# EAGLE board ACBoard (EAGLE 6.0)
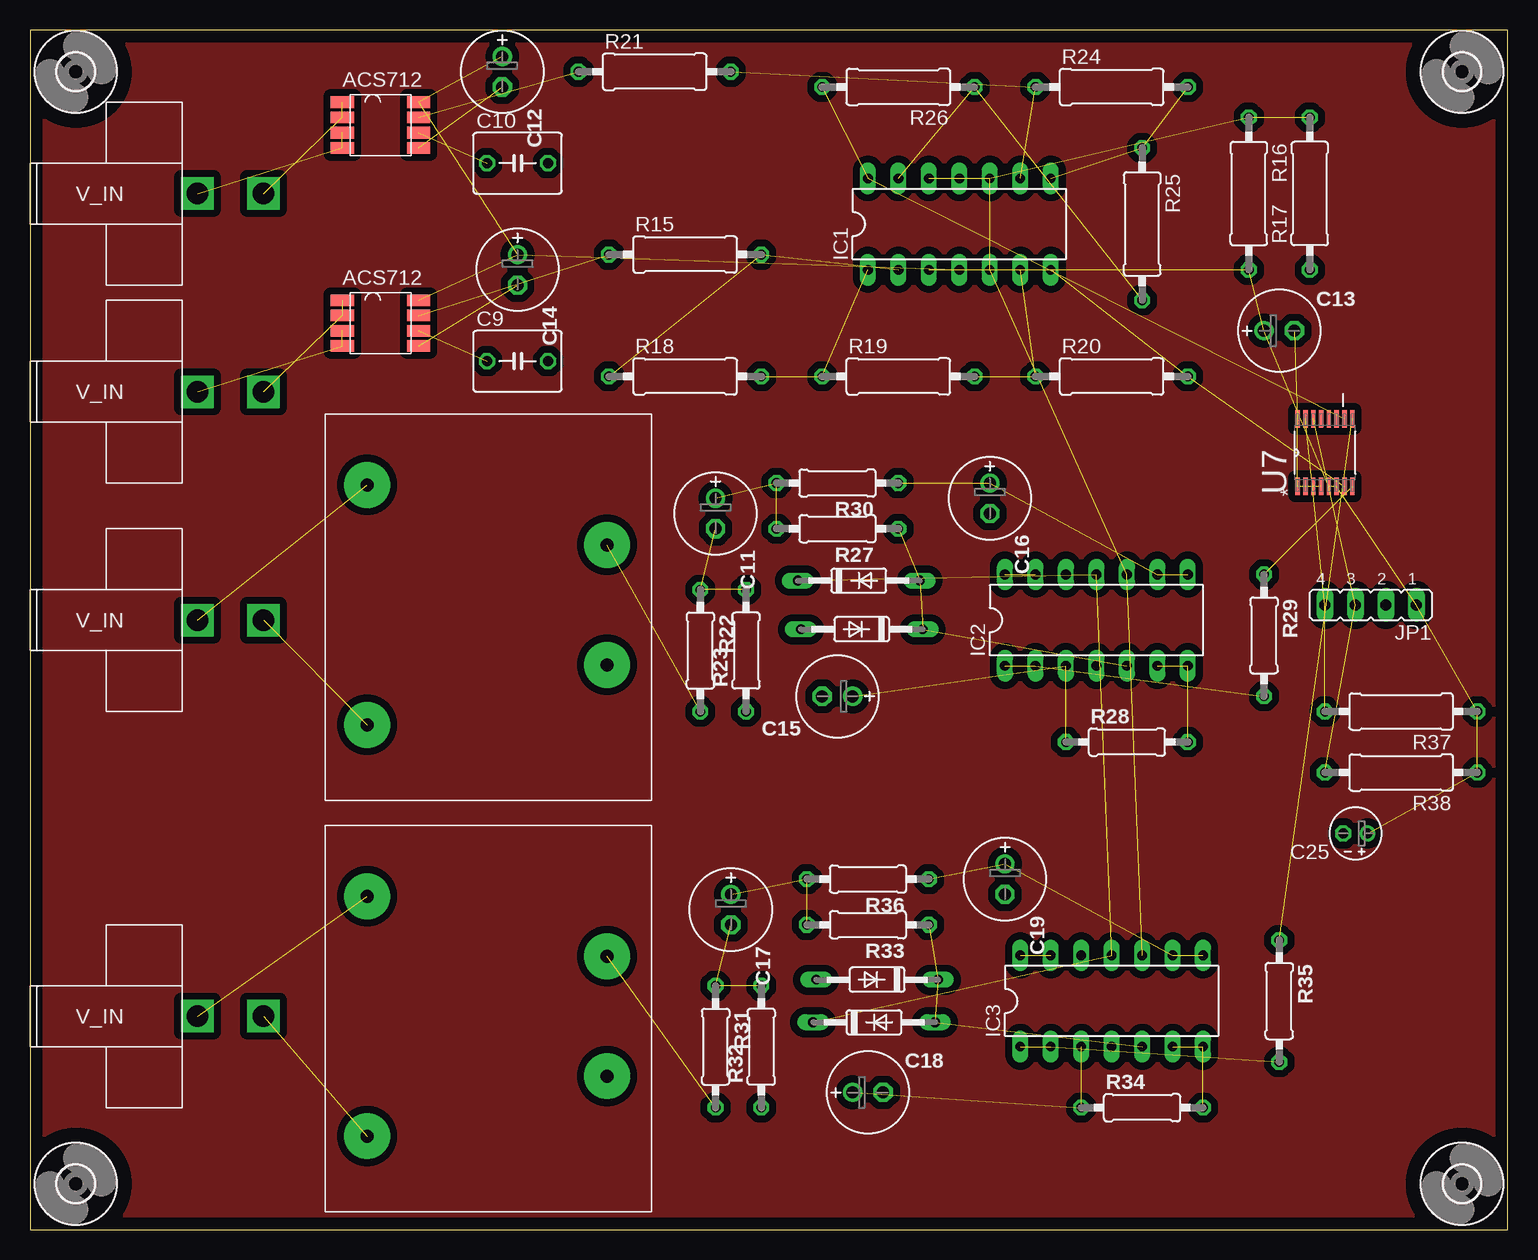
[diagram p0: board, top side]
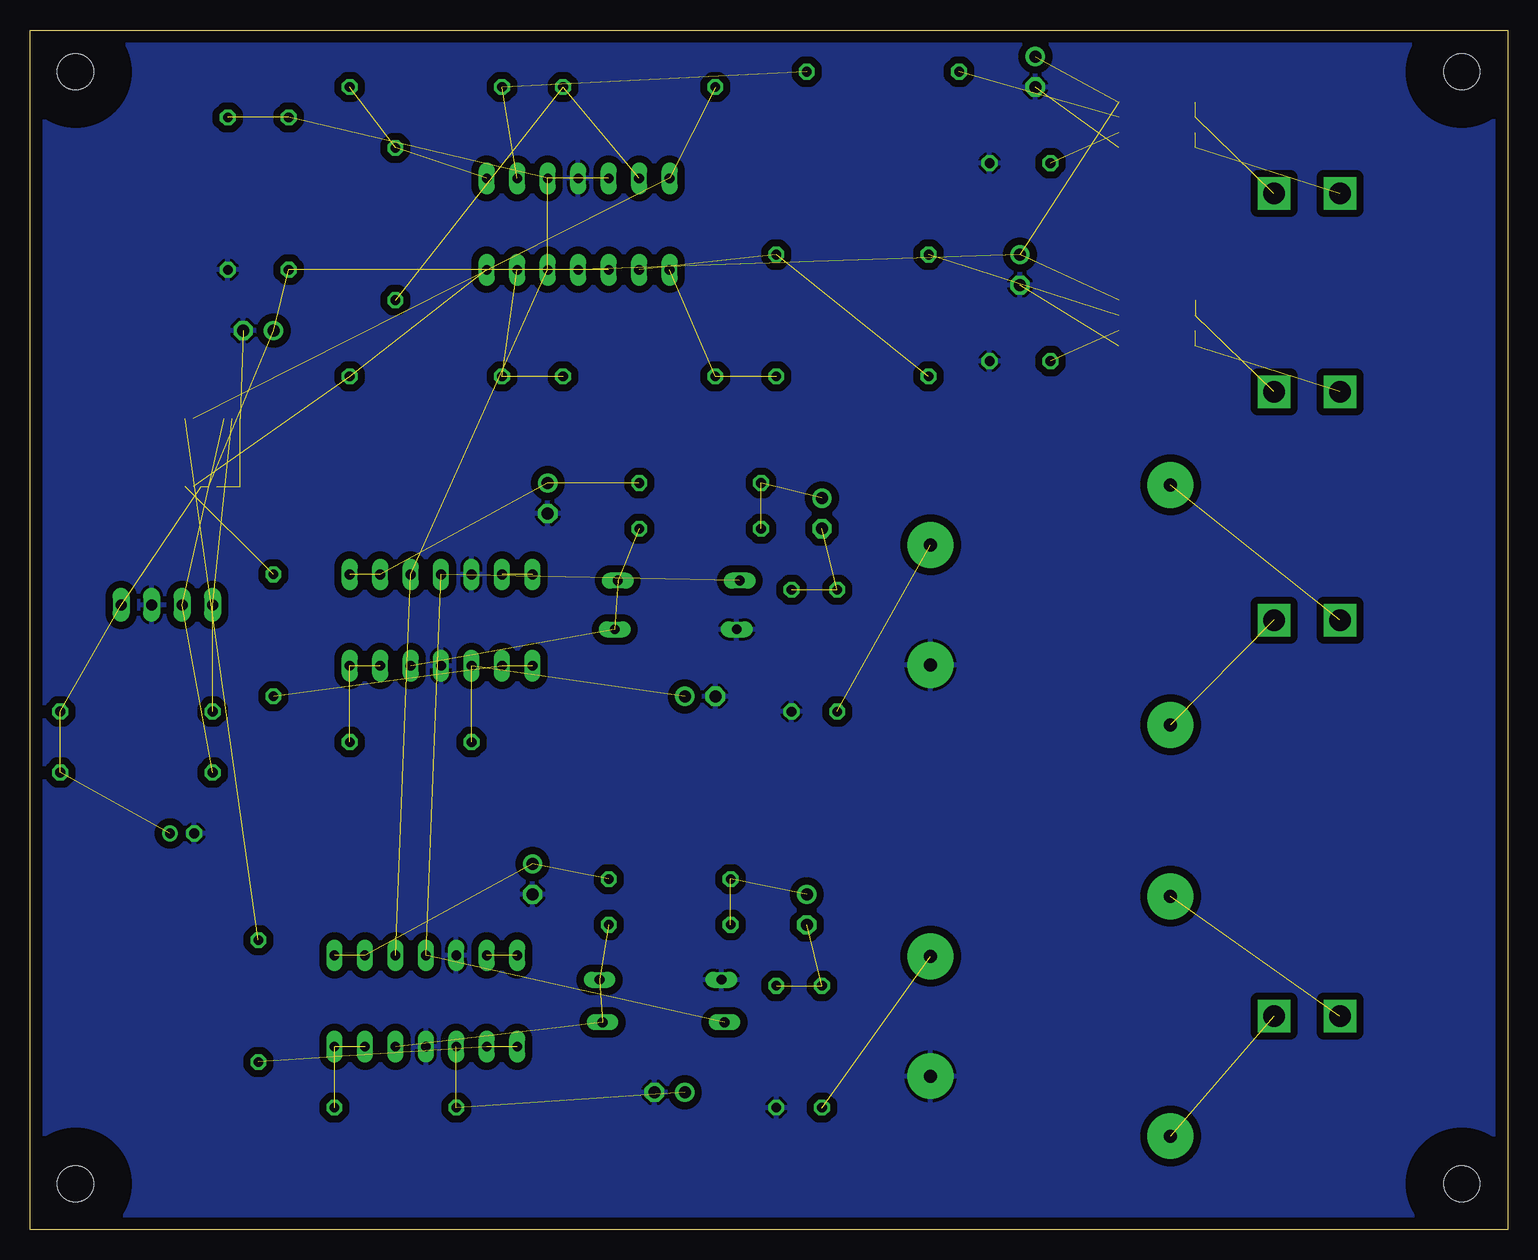
[diagram p1: board, bottom side, seen from below]

Size 123.17 x 100 mm. Coordinates in mm from the lower left corner, seen from the top.
Outline: 0,0 123.17,0 123.17,100 0,100 0,0
Copper layers (1*16): Top 0.035mm / dielectric 1.5mm / Bottom 0.035mm
Design rules: minimum track width 10mil, minimum drill 24mil, track to track 8mil, track to pad 8mil, pad to pad 8mil, via to via 8mil, smd to smd 8mil, copper to edge 40mil, drill to drill 8mil, minimum pad ring 10mil, minimum via ring 8mil, stop-mask expansion 4mil, vias tented up to drill 0mil, thermal gap 10mil

## Footprints (pad centres in the part's own frame; a part is rotated, then mirrored left to right if it is on the bottom)
C050-050X075 = drill 0.813 octagon: 1 -2.54,0; 2 2.54,0
E2,5-7---100UF = drill 1 pad 1.6: + -1.27,0 | drill 1 pad 1.6 octagon: - 1.27,0
E2-4 = drill 0.813 pad 1.27: + -1.016,0 | drill 0.813 pad 1.27 octagon: - 1.016,0
DIL14 = drill 0.813 long: 1 -7.62,-3.81; 2 -5.08,-3.81; 3 -2.54,-3.81; 4 0,-3.81; 5 2.54,-3.81; 6 5.08,-3.81; 7 7.62,-3.81; 8 7.62,3.81; 9 5.08,3.81; 10 2.54,3.81; 11 0,3.81; 12 -2.54,3.81; 13 -5.08,3.81; 14 -7.62,3.81
JP4 = drill 0.914 long: 1 -3.81,0; 2 -1.27,0; 3 1.27,0; 4 3.81,0
0309/12 = drill 0.813 octagon: 1 -6.35,0; 2 6.35,0
0207/10 = drill 0.8 octagon: 1 -5.08,0; 2 5.08,0
SOP65P640X120-16N = smd 1.473 x 0.356: 1 -2.819,2.286; 2 -2.819,1.626; 3 -2.819,0.965; 4 -2.819,0.33; 5 -2.819,-0.33; 6 -2.819,-0.965; 7 -2.819,-1.626; 8 -2.819,-2.286; 9 2.819,-2.286; 10 2.819,-1.626; 11 2.819,-0.965; 12 2.819,-0.33; 13 2.819,0.33; 14 2.819,0.965; 15 2.819,1.626; 16 2.819,2.286
INPUT_VOLTAGE_CONNECTOR = drill 1.8 square: V+ 0,0; V- 5.5,0
3,0 = hole 3: 0,0
SOIC8 = smd 1.93 x 0.965: 1 -4.445,1.27; 2 -4.445,0; 3 -4.445,-1.27; 4 -4.445,-2.54; 5 1.905,-2.54; 6 1.905,-1.27; 7 1.905,0; 8 1.905,1.27
4408 = drill 1.1 pad 3.81: PIN1 -10,10; PIN5 10,10; PIN7 5,-10; PIN9 -5,-10
D035-10 = drill 0.813 long: A 4.318,0.762; C -5.842,0.762

## Placement (x,y rotation side)
C9  1n  [C050-050X075]  40.64,72.39 0 top
C10  1n  [C050-050X075]  40.64,88.9 0 top
C11  100u Electrolytic  [E2,5-7---100UF]  57.15,59.69 270 top
C12  [E2,5-7---100UF]  39.37,96.52 270 top
C13  [E2,5-7---100UF]  104.14,74.93 0 top
C14  [E2,5-7---100UF]  40.64,80.01 270 top
C15  22n Ceramic  [E2,5-7---100UF]  67.31,44.45 180 top
C16  100n  [E2,5-7---100UF]  80.01,60.96 270 top
C17  100u Electrolytic  [E2,5-7---100UF]  58.42,26.67 270 top
C18  22n Ceramic  [E2,5-7---100UF]  69.85,11.43 0 top
C19  100n  [E2,5-7---100UF]  81.28,29.21 270 top
C25  [E2-4]  110.49,33.02 180 top
IC1  MCP604P  [DIL14]  77.47,83.82 0 top
IC2  MCP604P  [DIL14]  88.9,50.8 0 top
IC3  MCP604P  [DIL14]  90.17,19.05 0 top
JP1  [JP4]  111.76,52.07 180 top
R15  1k  [0309/12]  54.61,81.28 0 top
R16  1k  [0309/12]  101.6,86.36 270 top
R17  1k  [0309/12]  106.68,86.36 90 top
R18  1.5k  [0309/12]  54.61,71.12 0 top
R19  2k  [0309/12]  72.39,71.12 0 top
R20  1k  [0309/12]  90.17,71.12 0 top
R21  1k  [0309/12]  52.07,96.52 0 top
R22  56k  [0207/10]  55.88,48.26 270 top
R23  10k  [0207/10]  59.69,48.26 90 top
R24  1.5k  [0309/12]  90.17,95.25 0 top
R25  2k  [0309/12]  92.71,83.82 270 top
R26  1k  [0309/12]  72.39,95.25 180 top
R27  5.1k  [0207/10]  67.31,58.42 180 top
R28  100k  [0207/10]  91.44,40.64 0 top
R29  500  [0207/10]  102.87,49.53 270 top
R30  20k  [0207/10]  67.31,62.23 180 top
R31  56k  [0207/10]  57.15,15.24 270 top
R32  10k  [0207/10]  60.96,15.24 90 top
R33  5.1k  [0207/10]  69.85,25.4 180 top
R34  100k  [0207/10]  92.71,10.16 0 top
R35  500  [0207/10]  104.14,19.05 270 top
R36  20k  [0207/10]  69.85,29.21 180 top
R37  1.5k  [0309/12]  114.3,43.18 180 top
R38  1.5k  [0309/12]  114.3,38.1 180 top
U7  AD7993BRUZ-0  [SOP65P640X120-16N]  107.95,64.77 90 top
U$1  INPUT_VOLTAGE_CONNECTOR  [INPUT_VOLTAGE_CONNECTOR]  13.97,50.8 0 top
U$2  INPUT_VOLTAGE_CONNECTOR  [INPUT_VOLTAGE_CONNECTOR]  13.97,86.36 0 top
U$3  INPUT_VOLTAGE_CONNECTOR  [INPUT_VOLTAGE_CONNECTOR]  13.97,69.85 0 top
U$4  INPUT_VOLTAGE_CONNECTOR  [INPUT_VOLTAGE_CONNECTOR]  13.97,17.78 0 top
U$5  [3,0]  3.81,96.52 0 top
U$6  [3,0]  3.81,3.81 0 top
U$7  [3,0]  119.38,96.52 0 top
U$8  [3,0]  119.38,3.81 0 top
U$9  ACS712  [SOIC8]  30.48,76.2 0 top
U$11  ACS712  [SOIC8]  30.48,92.71 0 top
U$14  [4408]  38.1,52.07 90 top
U$15  SD103A  [D035-10]  69.85,53.34 0 top
U$16  SD103A  [D035-10]  68.58,50.8 180 top
U$18  [4408]  38.1,17.78 90 top
U$19  SD103A  [D035-10]  71.12,16.51 0 top
U$20  SD103A  [D035-10]  69.85,21.59 180 top

## Library data of the parts
C9 C10 C25 R15-R21 R24-R26 R37 R38 = resistor
C11-C19 R22 R23 R27-R36 = ee2parts
IC1-IC3 = linear - Power
JP1 = connectors
U7 = ADC; MPN: AD7993BRUZ-0; OC_FARNELL: 1078309; OC_NEWARK: 59K6101; PACKAGE: TSSOP-16; SUPPLIER: Analog Devices
U$1-U$4 = ekohub2013
U$5-U$8 = holes
U$9 U$11 U$14-U$16 U$18-U$20 = Pauls_parts

## Nets
2.5V: IC1.3 IC1.5 IC1.10 IC1.12 IC2.10 IC3.10 R16.1 R17.2
+3V3: IC2.11 IC3.11 U$15.C U$19.C
+5V: C12.+ C13.+ C14.+ C25.+ IC1.4 JP1.1 R16.2 R37.1 R38.1 U7.5 U7.6 U$9.8 U$11.8
GND: C9.2 C10.2 C12.- C13.- C14.- C15.- C16.- C18.- C19.- C25.- IC1.11 IC2.4 IC2.12 IC3.4 IC3.12 JP1.2 R17.1 R23.1 R32.1 U7.1 U7.2 U7.3 U7.4 U7.16 U$9.5 U$11.5 U$14.PIN9 U$16.A U$18.PIN9 U$20.A
I_OUT1: R29.1 U7.8
I_OUT2: R35.1 U7.9
N$14: U$3.V+ U$9.3 U$9.4
N$16: U$3.V- U$9.1 U$9.2
N$19: R15.1 U$9.7
N$20: IC1.2 R15.2 R18.1
N$22: C9.1 U$9.6
N$24: U$1.V+ U$14.PIN5
N$25: IC1.6 R19.2 R20.1
N$26: IC1.1 R18.2 R19.1
N$27: U$2.V+ U$11.3 U$11.4
N$28: U$2.V- U$11.1 U$11.2
N$29: R21.1 U$11.7
N$30: IC1.9 R21.2 R24.1
N$31: C10.1 U$11.6
N$32: U$1.V- U$14.PIN1
N$33: IC1.8 R24.2 R25.1
N$34: IC1.13 R25.2 R26.1
N$36: R22.2 U$14.PIN7
N$37: C11.- R22.1 R23.2
N$39: C11.+ R27.2 R30.2
N$40: IC2.5 R27.1 U$15.A U$16.C
N$41: IC2.6 IC2.7 R28.2
N$42: C15.+ IC2.3 R28.1
N$43: IC2.1 IC2.2 R29.2
N$45: C16.+ IC2.8 IC2.9 R30.1
N$46: IC2.13 IC2.14
N$47: U$4.V+ U$18.PIN5
N$48: U$4.V- U$18.PIN1
N$49: R31.2 U$18.PIN7
N$50: C17.- R31.1 R32.2
N$51: C17.+ R33.2 R36.2
N$52: IC3.5 R33.1 U$19.A U$20.C
N$53: IC3.6 IC3.7 R34.2
N$54: C18.+ IC3.3 R34.1
N$55: IC3.1 IC3.2 R35.2
N$57: C19.+ IC3.8 IC3.9 R36.1
N$58: IC3.13 IC3.14
SCL: JP1.4 R37.2 U7.15
SDA: JP1.3 R38.2 U7.14
VAC_OUT1: IC1.7 R20.2 U7.7
VAC_OUT2: IC1.14 R26.2 U7.10

## Tracks (layer width: path | path; a pad name or v marks a point on that pad's centre or on a via)
2.5V  (7 unrouted)
+3V3  (3 unrouted)
+5V  (12 unrouted)
GND  (7 unrouted)
  pour Bottom (isolate 0.61): 0,100.33 123.19,100.33 123.19,0 0,0
I_OUT1  (1 unrouted)
I_OUT2  (1 unrouted)
N$1
  pour Top (isolate 0.61): 0,100.33 123.19,100.33 123.19,0 0,0
N$14  (2 unrouted)
N$16  (2 unrouted)
N$19  (1 unrouted)
N$20  (2 unrouted)
N$22  (1 unrouted)
N$24  (1 unrouted)
N$25  (2 unrouted)
N$26  (2 unrouted)
N$27  (2 unrouted)
N$28  (2 unrouted)
N$29  (1 unrouted)
N$30  (2 unrouted)
N$31  (1 unrouted)
N$32  (1 unrouted)
N$33  (2 unrouted)
N$34  (2 unrouted)
N$36  (1 unrouted)
N$37  (2 unrouted)
N$39  (2 unrouted)
N$40  (3 unrouted)
N$41  (2 unrouted)
N$42  (2 unrouted)
N$43  (2 unrouted)
N$45  (3 unrouted)
N$46  (1 unrouted)
N$47  (1 unrouted)
N$48  (1 unrouted)
N$49  (1 unrouted)
N$50  (2 unrouted)
N$51  (2 unrouted)
N$52  (3 unrouted)
N$53  (2 unrouted)
N$54  (2 unrouted)
N$55  (2 unrouted)
N$57  (3 unrouted)
N$58  (1 unrouted)
SCL  (2 unrouted)
SDA  (2 unrouted)
VAC_OUT1  (2 unrouted)
VAC_OUT2  (2 unrouted)